# Allegro board RK3588_CORE.brd
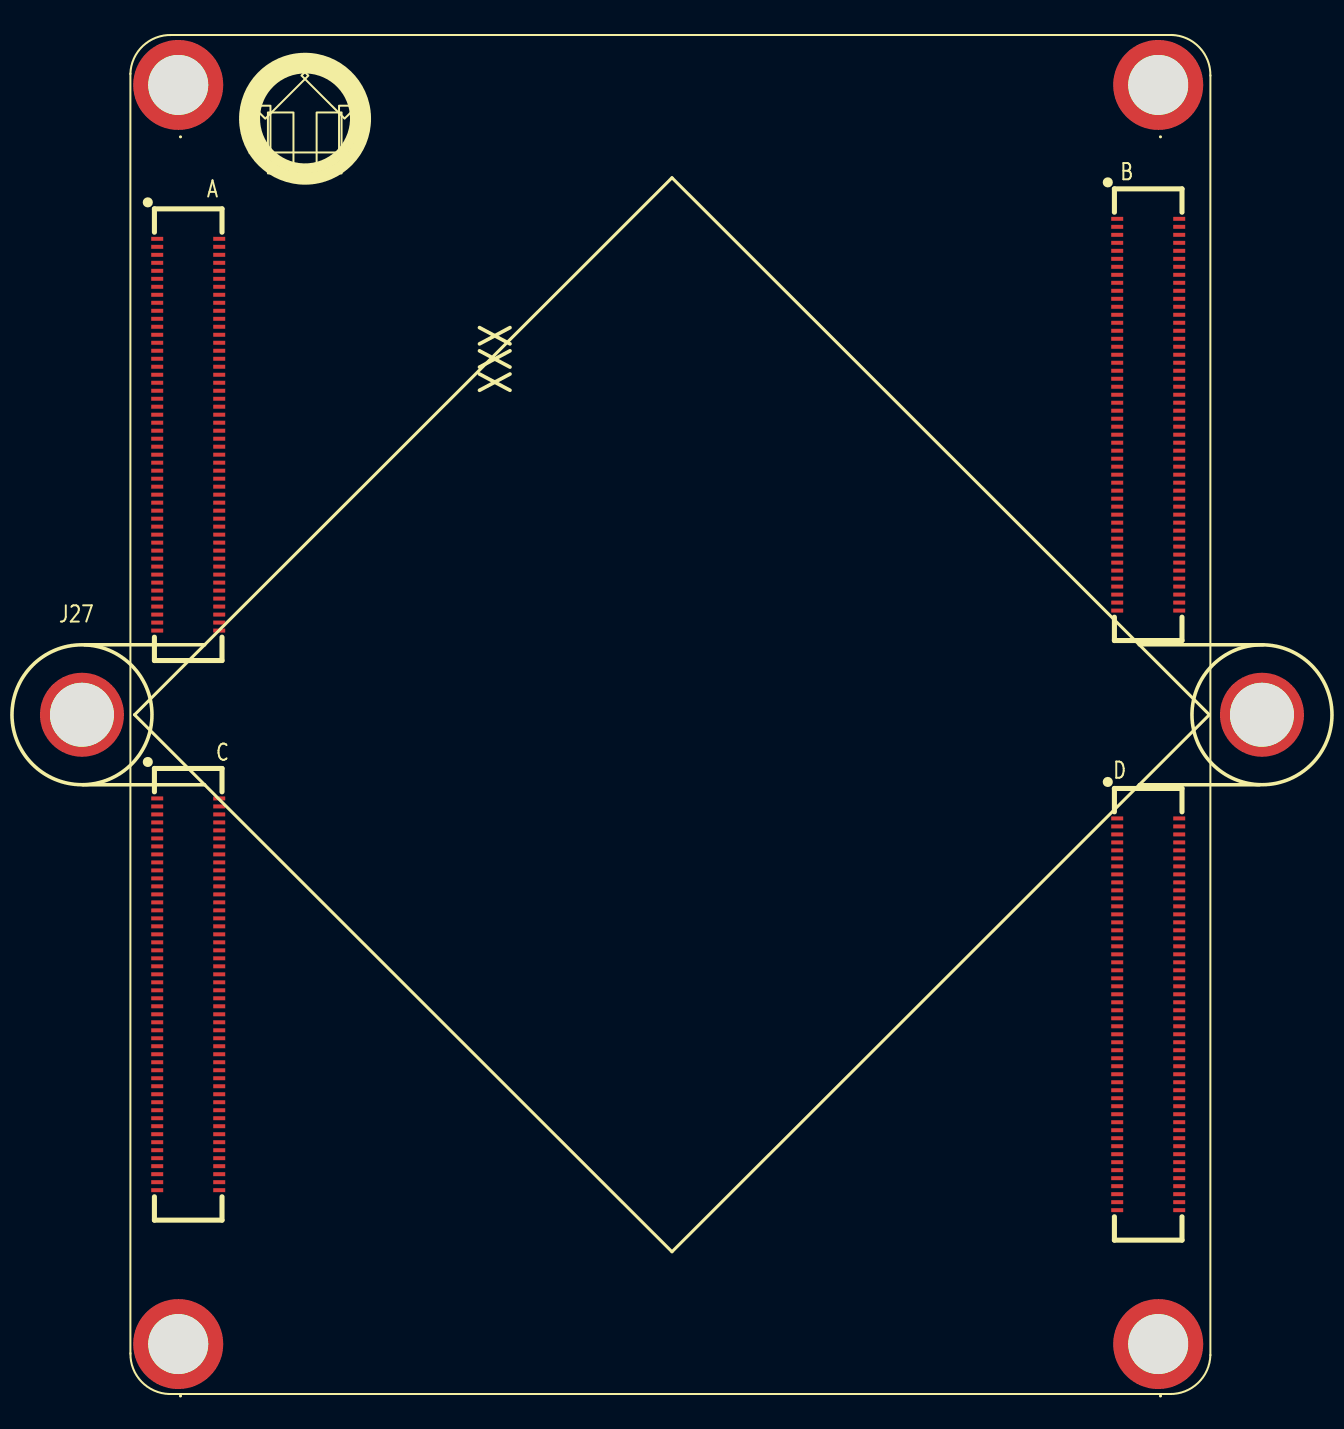
[diagram p0: board, top side]
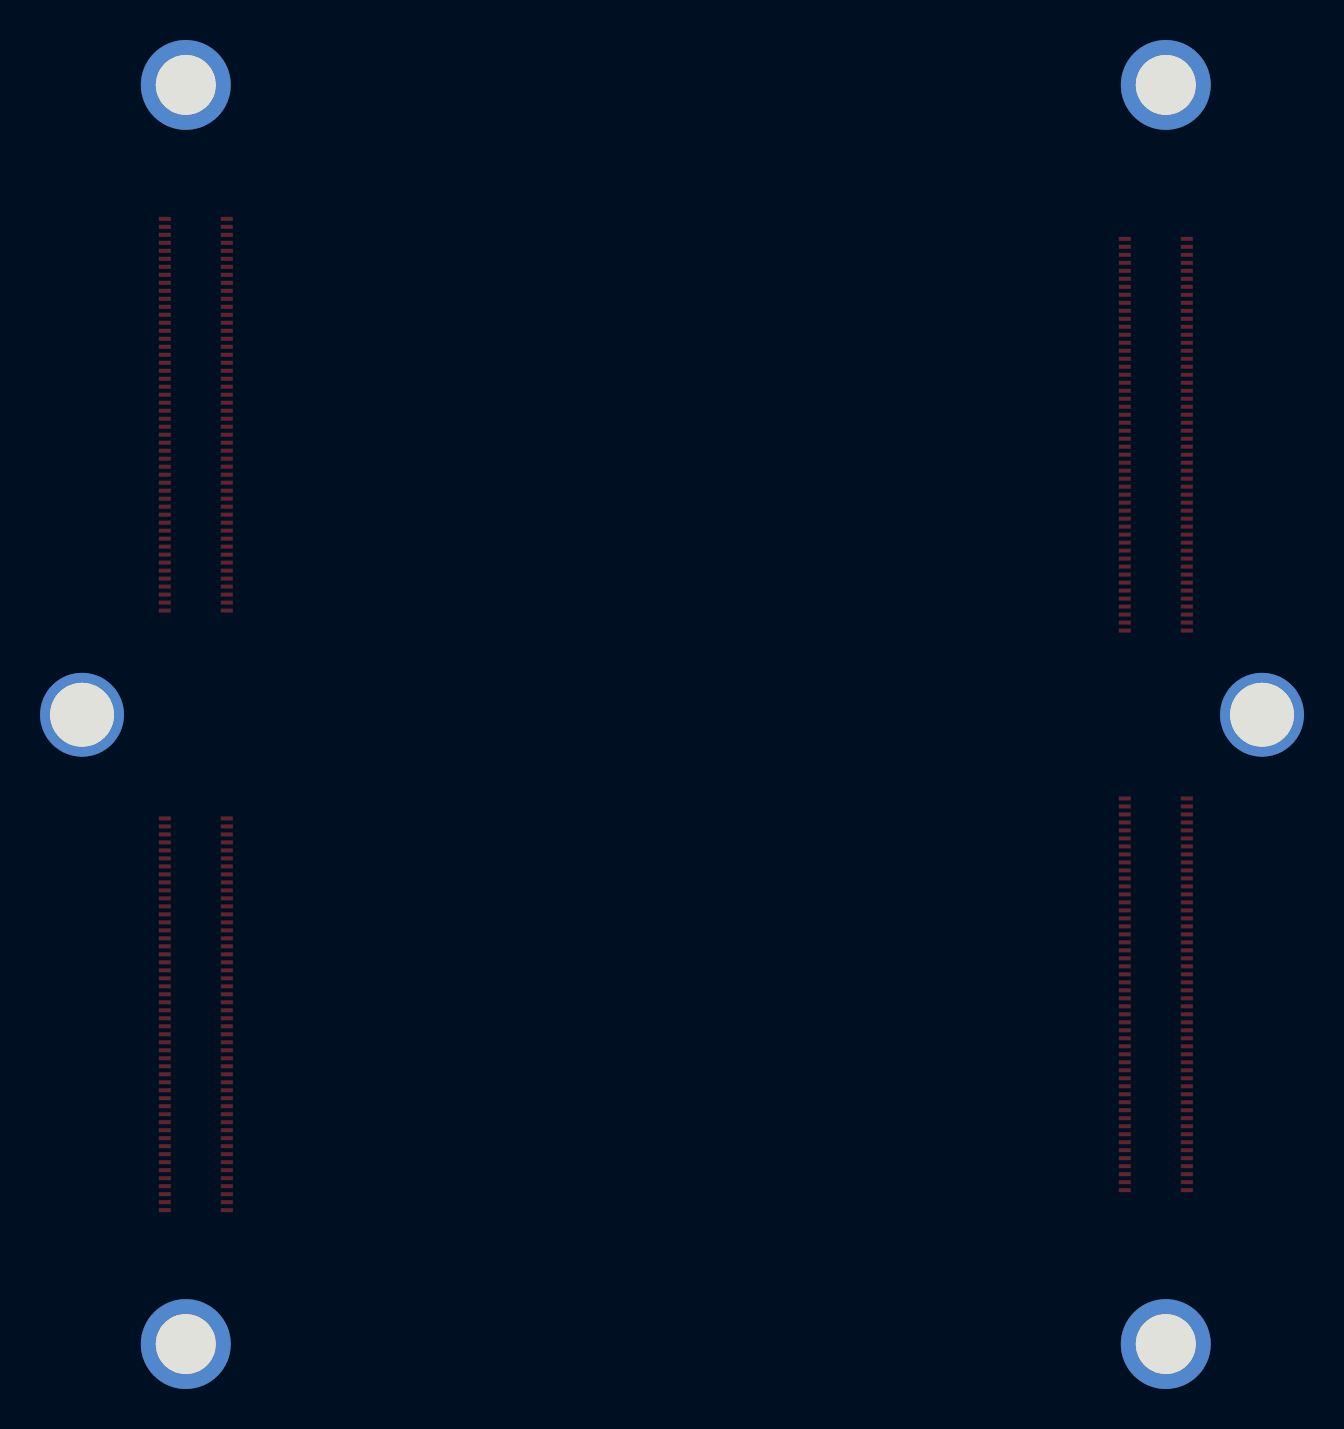
[diagram p1: board, bottom side, seen from below]

No outline. copper layers: TOP, S1/GND2, GND3, BOTTOM. Coordinates in mm from the lowest, leftmost part position.

## Design rules (mm)
constraint set DEFAULT: min track width 0.114

## Placement (name value [footprint] x y rotation side)
A  -  [DF40C-100DS-0_4V_51__1]  0.5 45.5 270 top
B  -  [DF40C-100DS-0_4V_51__1]  48.5 46.5 270 top
C  -  [DF40C-100DS-0_4V_51_]  0.5 17.5 270 top
D  -  [DF40C-100DS-0_4V_51__1]  48.5 16.5 270 top
J27  -  [40X40MM_FAN_59MM]  24.69 31.49 315 top
MTG1  -  [NIL-NAMEMAPPER]  0 63 270 top
MTG2  -  [NIL-NAMEMAPPER_2]  49 63 270 top
MTG3  -  [NIL-NAMEMAPPER_1]  0 0 270 top
MTG4  -  [NIL-NAMEMAPPER_3]  49 0 270 top

## Library data of the parts
A B D = DF40C-100DS-0_4V_51__1
C = DF40C-100DS-0_4V_51_
J27 = 40X40MM_FAN_59MM
MTG1 = NIL-NAMEMAPPER
MTG2 = NIL-NAMEMAPPER_2
MTG3 = NIL-NAMEMAPPER_1
MTG4 = NIL-NAMEMAPPER_3

## Footprints (pads in the part's own frame, mm; a bottom-side part is the same pattern mirrored in y, then rotated)
40X40MM_FAN_59MM
  round 4.2 hole 3.2: 1(-20.86,-20.86) 2(20.86,20.86)
DF40C-100DS-0_4V_51_
  rect 0.2x0.6 smd: 1(-9.8,-1.55) 2(-9.4,-1.55) 3(-9,-1.55) 4(-8.6,-1.55) 5(-8.2,-1.55) 6(-7.8,-1.55) 7(-7.4,-1.55) 8(-7,-1.55) 9(-6.6,-1.55) 10(-6.2,-1.55) 11(-5.8,-1.55) 12(-5.4,-1.55) 13(-5,-1.55) 14(-4.6,-1.55) 15(-4.2,-1.55) 16(-3.8,-1.55) 17(-3.4,-1.55) 18(-3,-1.55) 19(-2.6,-1.55) 20(-2.2,-1.55) 21(-1.8,-1.55) 22(-1.4,-1.55) 23(-1,-1.55) 24(-0.6,-1.55) 25(-0.2,-1.55) 26(0.2,-1.55) 27(0.6,-1.55) 28(1,-1.55) 29(1.4,-1.55) 30(1.8,-1.55) 31(2.2,-1.55) 32(2.6,-1.55) 33(3,-1.55) 34(3.4,-1.55) 35(3.8,-1.55) 36(4.2,-1.55) 37(4.6,-1.55) 38(5,-1.55) 39(5.4,-1.55) 40(5.8,-1.55) 41(6.2,-1.55) 42(6.6,-1.55) 43(7,-1.55) 44(7.4,-1.55) 45(7.8,-1.55) 46(8.2,-1.55) 47(8.6,-1.55) 48(9,-1.55) 49(9.4,-1.55) 50(9.8,-1.55) 51(9.8,1.55) 52(9.4,1.55) 53(9,1.55) 54(8.6,1.55) 55(8.2,1.55) 56(7.8,1.55) 57(7.4,1.55) 58(7,1.55) 59(6.6,1.55) 60(6.2,1.55) 61(5.8,1.55) 62(5.4,1.55) 63(5,1.55) 64(4.6,1.55) 65(4.2,1.55) 66(3.8,1.55) 67(3.4,1.55) 68(3,1.55) 69(2.6,1.55) 70(2.2,1.55) 71(1.8,1.55) 72(1.4,1.55) 73(1,1.55) 74(0.6,1.55) 75(0.2,1.55) 76(-0.2,1.55) 77(-0.6,1.55) 78(-1,1.55) 79(-1.4,1.55) 80(-1.8,1.55) 81(-2.2,1.55) 82(-2.6,1.55) 83(-3,1.55) 84(-3.4,1.55) 85(-3.8,1.55) 86(-4.2,1.55) 87(-4.6,1.55) 88(-5,1.55) 89(-5.4,1.55) 90(-5.8,1.55) 91(-6.2,1.55) 92(-6.6,1.55) 93(-7,1.55) 94(-7.4,1.55) 95(-7.8,1.55) 96(-8.2,1.55) 97(-8.6,1.55) 98(-9,1.55) 99(-9.4,1.55) 100(-9.8,1.55)
DF40C-100DS-0_4V_51__1
  rect 0.2x0.6 smd: 1(-9.8,-1.55) 2(-9.4,-1.55) 3(-9,-1.55) 4(-8.6,-1.55) 5(-8.2,-1.55) 6(-7.8,-1.55) 7(-7.4,-1.55) 8(-7,-1.55) 9(-6.6,-1.55) 10(-6.2,-1.55) 11(-5.8,-1.55) 12(-5.4,-1.55) 13(-5,-1.55) 14(-4.6,-1.55) 15(-4.2,-1.55) 16(-3.8,-1.55) 17(-3.4,-1.55) 18(-3,-1.55) 19(-2.6,-1.55) 20(-2.2,-1.55) 21(-1.8,-1.55) 22(-1.4,-1.55) 23(-1,-1.55) 24(-0.6,-1.55) 25(-0.2,-1.55) 26(0.2,-1.55) 27(0.6,-1.55) 28(1,-1.55) 29(1.4,-1.55) 30(1.8,-1.55) 31(2.2,-1.55) 32(2.6,-1.55) 33(3,-1.55) 34(3.4,-1.55) 35(3.8,-1.55) 36(4.2,-1.55) 37(4.6,-1.55) 38(5,-1.55) 39(5.4,-1.55) 40(5.8,-1.55) 41(6.2,-1.55) 42(6.6,-1.55) 43(7,-1.55) 44(7.4,-1.55) 45(7.8,-1.55) 46(8.2,-1.55) 47(8.6,-1.55) 48(9,-1.55) 49(9.4,-1.55) 50(9.8,-1.55) 51(9.8,1.55) 52(9.4,1.55) 53(9,1.55) 54(8.6,1.55) 55(8.2,1.55) 56(7.8,1.55) 57(7.4,1.55) 58(7,1.55) 59(6.6,1.55) 60(6.2,1.55) 61(5.8,1.55) 62(5.4,1.55) 63(5,1.55) 64(4.6,1.55) 65(4.2,1.55) 66(3.8,1.55) 67(3.4,1.55) 68(3,1.55) 69(2.6,1.55) 70(2.2,1.55) 71(1.8,1.55) 72(1.4,1.55) 73(1,1.55) 74(0.6,1.55) 75(0.2,1.55) 76(-0.2,1.55) 77(-0.6,1.55) 78(-1,1.55) 79(-1.4,1.55) 80(-1.8,1.55) 81(-2.2,1.55) 82(-2.6,1.55) 83(-3,1.55) 84(-3.4,1.55) 85(-3.8,1.55) 86(-4.2,1.55) 87(-4.6,1.55) 88(-5,1.55) 89(-5.4,1.55) 90(-5.8,1.55) 91(-6.2,1.55) 92(-6.6,1.55) 93(-7,1.55) 94(-7.4,1.55) 95(-7.8,1.55) 96(-8.2,1.55) 97(-8.6,1.55) 98(-9,1.55) 99(-9.4,1.55) 100(-9.8,1.55)
NIL-NAMEMAPPER
  round 4.5 hole 3: 1(0,0)
NIL-NAMEMAPPER_1
  round 4.5 hole 3: 1(0,0)
NIL-NAMEMAPPER_2
  round 4.5 hole 3: 1(0,0)
NIL-NAMEMAPPER_3
  round 4.5 hole 3: 1(0,0)

## Nets
GND: A.1 A.32 A.35 A.38 A.41 A.44 A.47 A.50 A.51 A.54 A.57 A.60 A.63 A.66 A.69 A.72 A.75 A.78 A.81 A.84 A.87 A.90 A.93 A.100 B.23 B.26 B.29 B.32 B.35 B.38 B.41 B.44 B.47 B.50 B.51 B.54 B.57 B.60 B.63 B.66 B.69 B.72 B.75 B.78 B.81 C.1 C.4 C.10 C.13 C.16 C.19 C.22 C.25 C.28 C.31 C.34 C.37 C.40 C.43 C.58 C.61 C.64 C.67 C.70 C.73 C.76 C.79 C.82 C.85 C.88 C.91 C.94 C.97 C.100 D.13 D.20 D.27 D.32 D.35 D.38 D.41 D.44 D.47 D.50 D.51 D.54 D.57 D.60 D.63 D.66 D.69 D.74 D.81 D.88 J27.1 J27.2 MTG1.1 MTG2.1 MTG3.1 MTG4.1
VCC4V0_SYS: C.47 C.48 C.49 C.50 C.51 C.52 C.53 C.54
VCC_1V8_S0: C.45
5G_RESET: D.2
BOOT_SARADC_IN0: A.2
CAN1_RX_M1: A.23
CAN1_TX_M1: A.22
EDP0_TX_AUX_N: A.92
EDP0_TX_AUX_P: A.91
EDP0_TX_D0_N: A.86
EDP0_TX_D0_P: A.85
EDP0_TX_D1_N: A.83
EDP0_TX_D1_P: A.82
EDP0_TX_D2_N: A.80
EDP0_TX_D2_P: A.79
EDP0_TX_D3_N: A.89
EDP0_TX_D3_P: A.88
EDP1_TX_AUX_N: A.77
EDP1_TX_AUX_P: A.76
EDP1_TX_D0_N: A.71
EDP1_TX_D0_P: A.70
EDP1_TX_D1_N: A.68
EDP1_TX_D1_P: A.67
EDP1_TX_D2_N: A.65
EDP1_TX_D2_P: A.64
EDP1_TX_D3_N: A.74
EDP1_TX_D3_P: A.73
GMAC0_MDC: D.29
GMAC0_MDIO: D.28
GMAC0_RSTN_L: D.30
GMAC0_RXCLK: D.26
GMAC0_RXD0: D.24
GMAC0_RXD1: D.23
GMAC0_RXD2: D.22
GMAC0_RXD3: D.21
GMAC0_RXDV_CRS: D.25
GMAC0_TXCLK: D.19
GMAC0_TXD0: D.17
GMAC0_TXD1: D.16
GMAC0_TXD2: D.15
GMAC0_TXD3: D.14
GMAC0_TXEN: D.18
GMAC1_MDC: D.72
GMAC1_MDIO: D.73
GMAC1_RSTN_L: D.71
GMAC1_RXCLK: D.75
GMAC1_RXD0: D.77
GMAC1_RXD1: D.78
GMAC1_RXD2: D.79
GMAC1_RXD3: D.80
GMAC1_RXDV_CRS: D.76
GMAC1_TXCLK: D.82
GMAC1_TXD0: D.84
GMAC1_TXD1: D.85
GMAC1_TXD2: D.86
GMAC1_TXD3: D.87
GMAC1_TXEN: D.83
GPIO0_A0: D.99
GPIO0_A4: D.100
GPIO0_B0: D.96
GPIO0_B2: D.97
GPIO0_B5: B.10
GPIO0_B6: B.9
GPIO0_B7: D.95
GPIO0_C0: B.8
GPIO0_C2: B.7
GPIO0_C4: B.88
GPIO0_C5: D.91
GPIO0_C7: D.3
GPIO0_D0: D.4
GPIO0_D3: D.5
GPIO1_A0: B.100
GPIO1_A1: B.99
GPIO1_A2: B.1
GPIO1_A3: D.98
GPIO1_A4: B.4
GPIO1_A5: B.85
GPIO1_A6: B.86
GPIO1_A7: B.98
GPIO1_B0: B.96
GPIO1_B1: B.97
GPIO1_B2: B.95
GPIO1_B3: B.22
GPIO1_B4: B.20
GPIO1_B5: B.21
GPIO1_B6: B.2
GPIO1_B7: B.5
GPIO1_C0: B.92
GPIO1_C1: B.91
GPIO1_C2: B.16
GPIO1_C3: B.15
GPIO1_C4: B.19
GPIO1_C5: B.13
GPIO1_C6: B.90
GPIO1_C7: B.14
GPIO1_D0: B.17
GPIO1_D1: B.18
GPIO1_D2: B.3
GPIO1_D3: B.6
GPIO1_D4: B.12
GPIO1_D5: B.89
GPIO1_D6: B.94
GPIO1_D7: B.93
GPIO2_B4: D.92
GPIO2_B5: D.93
GPIO2_C3: D.90
GPIO2_C4: D.12
GPIO2_C5: D.94
GPIO3_A6: D.7
GPIO3_B2: D.1
GPIO3_B6: D.70
GPIO3_C0: D.6
GPIO3_C1: D.9
GPIO3_C4: A.12
GPIO3_C5: A.10
GPIO3_C6: A.11
GPIO3_C7: D.10
GPIO3_D0: D.11
GPIO3_D1: A.15
GPIO3_D2: A.13
GPIO3_D3: A.14
GPIO3_D4: B.87
GPIO3_D5: D.8
GPIO4_A0: A.26
GPIO4_A1: A.25
GPIO4_A2: A.30
GPIO4_A3: C.57
GPIO4_A4: C.56
GPIO4_A5: A.27
GPIO4_A6: A.28
GPIO4_A7: A.29
GPIO4_B0: A.24
GPIO4_B1: A.19
GPIO4_B4: B.83
GPIO4_B5: B.84
GPIO4_B6: B.82
GPIO4_B7: A.17
GPIO4_C0: A.16
GPIO4_C1: A.18
GPIO4_C3: D.31
GPIO4_D0: A.99
GPIO4_D1: A.98
GPIO4_D2: A.97
GPIO4_D3: A.96
GPIO4_D4: A.95
GPIO4_D5: A.94
HDMI_RX_CLK_N: A.62
HDMI_RX_CLK_P: A.61
HDMI_RX_D0_N: A.59
HDMI_RX_D0_P: A.58
HDMI_RX_D1_N: A.56
HDMI_RX_D1_P: A.55
HDMI_RX_D2_N: A.53
HDMI_RX_D2_P: A.52
MIPI_CSI0_RX_CLK0_N: D.39
MIPI_CSI0_RX_CLK0_P: D.40
MIPI_CSI0_RX_CLK1_N: D.48
MIPI_CSI0_RX_CLK1_P: D.49
MIPI_CSI0_RX_D0_N: D.33
MIPI_CSI0_RX_D0_P: D.34
MIPI_CSI0_RX_D1_N: D.36
MIPI_CSI0_RX_D1_P: D.37
MIPI_CSI0_RX_D2_N: D.42
MIPI_CSI0_RX_D2_P: D.43
MIPI_CSI0_RX_D3_N: D.45
MIPI_CSI0_RX_D3_P: D.46
MIPI_CSI1_RX_CLK0_N: D.61
MIPI_CSI1_RX_CLK0_P: D.62
MIPI_CSI1_RX_CLK1_N: D.52
MIPI_CSI1_RX_CLK1_P: D.53
MIPI_CSI1_RX_D0_N: D.67
MIPI_CSI1_RX_D0_P: D.68
MIPI_CSI1_RX_D1_N: D.64
MIPI_CSI1_RX_D1_P: D.65
MIPI_CSI1_RX_D2_N: D.58
MIPI_CSI1_RX_D2_P: D.59
MIPI_CSI1_RX_D3_N: D.55
MIPI_CSI1_RX_D3_P: D.56
MIPI_DPHY0_RX_CLK_N: C.36
MIPI_DPHY0_RX_CLK_P: C.35
MIPI_DPHY0_RX_D0_N: C.30
MIPI_DPHY0_RX_D0_P: C.29
MIPI_DPHY0_RX_D1_N: C.33
MIPI_DPHY0_RX_D1_P: C.32
MIPI_DPHY0_RX_D2_N: C.39
MIPI_DPHY0_RX_D2_P: C.38
MIPI_DPHY0_RX_D3_N: C.42
MIPI_DPHY0_RX_D3_P: C.41
MIPI_DPHY0_TX_CLK_N: C.66
MIPI_DPHY0_TX_CLK_P: C.65
MIPI_DPHY0_TX_D0_N: C.72
MIPI_DPHY0_TX_D0_P: C.71
MIPI_DPHY0_TX_D1_N: C.69
MIPI_DPHY0_TX_D1_P: C.68
MIPI_DPHY0_TX_D2_N: C.63
MIPI_DPHY0_TX_D2_P: C.62
MIPI_DPHY0_TX_D3_N: C.60
MIPI_DPHY0_TX_D3_P: C.59
MIPI_DPHY1_RX_CLK_N: C.21
MIPI_DPHY1_RX_CLK_P: C.20
MIPI_DPHY1_RX_D0_N: C.15
MIPI_DPHY1_RX_D0_P: C.14
MIPI_DPHY1_RX_D1_N: C.18
MIPI_DPHY1_RX_D1_P: C.17
MIPI_DPHY1_RX_D2_N: C.24
MIPI_DPHY1_RX_D2_P: C.23
MIPI_DPHY1_RX_D3_N: C.27
MIPI_DPHY1_RX_D3_P: C.26
MIPI_DPHY1_TX_CLK_N: C.81
MIPI_DPHY1_TX_CLK_P: C.80
MIPI_DPHY1_TX_D0_N: C.87
MIPI_DPHY1_TX_D0_P: C.86
MIPI_DPHY1_TX_D1_N: C.84
MIPI_DPHY1_TX_D1_P: C.83
MIPI_DPHY1_TX_D2_N: C.78
MIPI_DPHY1_TX_D2_P: C.77
MIPI_DPHY1_TX_D3_N: C.75
MIPI_DPHY1_TX_D3_P: C.74
PCIE20_0_REFCLK_N: B.58
PCIE20_0_REFCLK_P: B.59
PCIE20_1_REFCLK_N: B.42
PCIE20_1_REFCLK_P: B.43
PCIE20_1_RX_N: B.49
PCIE20_1_RX_P: B.48
PCIE20_1_TX_N: B.46
PCIE20_1_TX_P: B.45
PCIE20_2_REFCLK_N: B.39
PCIE20_2_REFCLK_P: B.40
PCIE30_PORT0_REFCLK_IN_N: B.30
PCIE30_PORT0_REFCLK_IN_P: B.31
PCIE30_PORT0_RX0_N: B.36
PCIE30_PORT0_RX0_P: B.37
PCIE30_PORT0_RX1_N: B.33
PCIE30_PORT0_RX1_P: B.34
PCIE30_PORT0_TX0_N: B.27
PCIE30_PORT0_TX0_P: B.28
PCIE30_PORT0_TX1_N: B.24
PCIE30_PORT0_TX1_P: B.25
PCIE30_PORT1_REFCLK_IN_N: B.79
PCIE30_PORT1_REFCLK_IN_P: B.80
PCIE30_PORT1_RX2_N: B.68
PCIE30_PORT1_RX2_P: B.67
PCIE30_PORT1_RX3_N: B.71
PCIE30_PORT1_RX3_P: B.70
PCIE30_PORT1_TX2_N: B.74
PCIE30_PORT1_TX2_P: B.73
PCIE30_PORT1_TX3_N: B.77
PCIE30_PORT1_TX3_P: B.76
PMIC_EXT_EN_OUT: C.46
PWRON_L: C.44
RESET_L: C.55
SARADC_VIN1_KEY/RECOVERY: A.3
SARADC_VIN2: A.4
SARADC_VIN3_HP_HOOK: A.5
SARADC_VIN4: A.6
SARADC_VIN5_HW_ID: A.7
SARADC_VIN6: A.8
SARADC_VIN7_LCD_ID0: A.9
SATA30_0_RX_N: B.52
SATA30_0_RX_P: B.53
SATA30_0_TX_N: B.55
SATA30_0_TX_P: B.56
TYPEC0_OTG_D_N: C.11
TYPEC0_OTG_D_P: C.12
TYPEC0_SBU1: C.8
TYPEC0_SBU2: C.9
TYPEC0_SSRX1_N: C.99
TYPEC0_SSRX1_P: C.98
TYPEC0_SSRX2_N: C.93
TYPEC0_SSRX2_P: C.92
TYPEC0_SSTX1_N: C.96
TYPEC0_SSTX1_P: C.95
TYPEC0_SSTX2_N: C.90
TYPEC0_SSTX2_P: C.89
TYPEC0_USB20_OTG_ID: A.20
TYPEC0_USB20_VBUSDET: C.7
TYPEC1_OTG_D_N: C.2
TYPEC1_OTG_D_P: C.3
TYPEC1_SBU1: C.5
TYPEC1_SBU2: C.6
TYPEC1_SSRX1_N: A.33
TYPEC1_SSRX1_P: A.34
TYPEC1_SSRX2_N: A.39
TYPEC1_SSRX2_P: A.40
TYPEC1_SSTX1_N: A.36
TYPEC1_SSTX1_P: A.37
TYPEC1_SSTX2_N: A.42
TYPEC1_SSTX2_P: A.43
TYPEC1_USB20_OTG_ID: A.21
TYPEC1_USB20_VBUSDET: A.31
USB20_HOST0_D_N: A.46
USB20_HOST0_D_P: A.45
USB20_HOST1_D_N: A.49
USB20_HOST1_D_P: A.48
USB30_2_SSRX_N: B.61
USB30_2_SSRX_P: B.62
USB30_2_SSTX_N: B.64
USB30_2_SSTX_P: B.65

Pads without a net: B 11; D 89
